# Altium PCB CFD_Chip_Test.PcbDoc (part 1 of 2)
Units mil, origin at the board's own origin, x right, y up, seen from the top; angles counter-clockwise.
Board outline 3185 x 3310 mil, 2 copper layers (Top Layer, Bottom Layer); 115 components, 90 nets, 432 pads, 99 vias.
Unrouted connection lines stored in the file: 1.
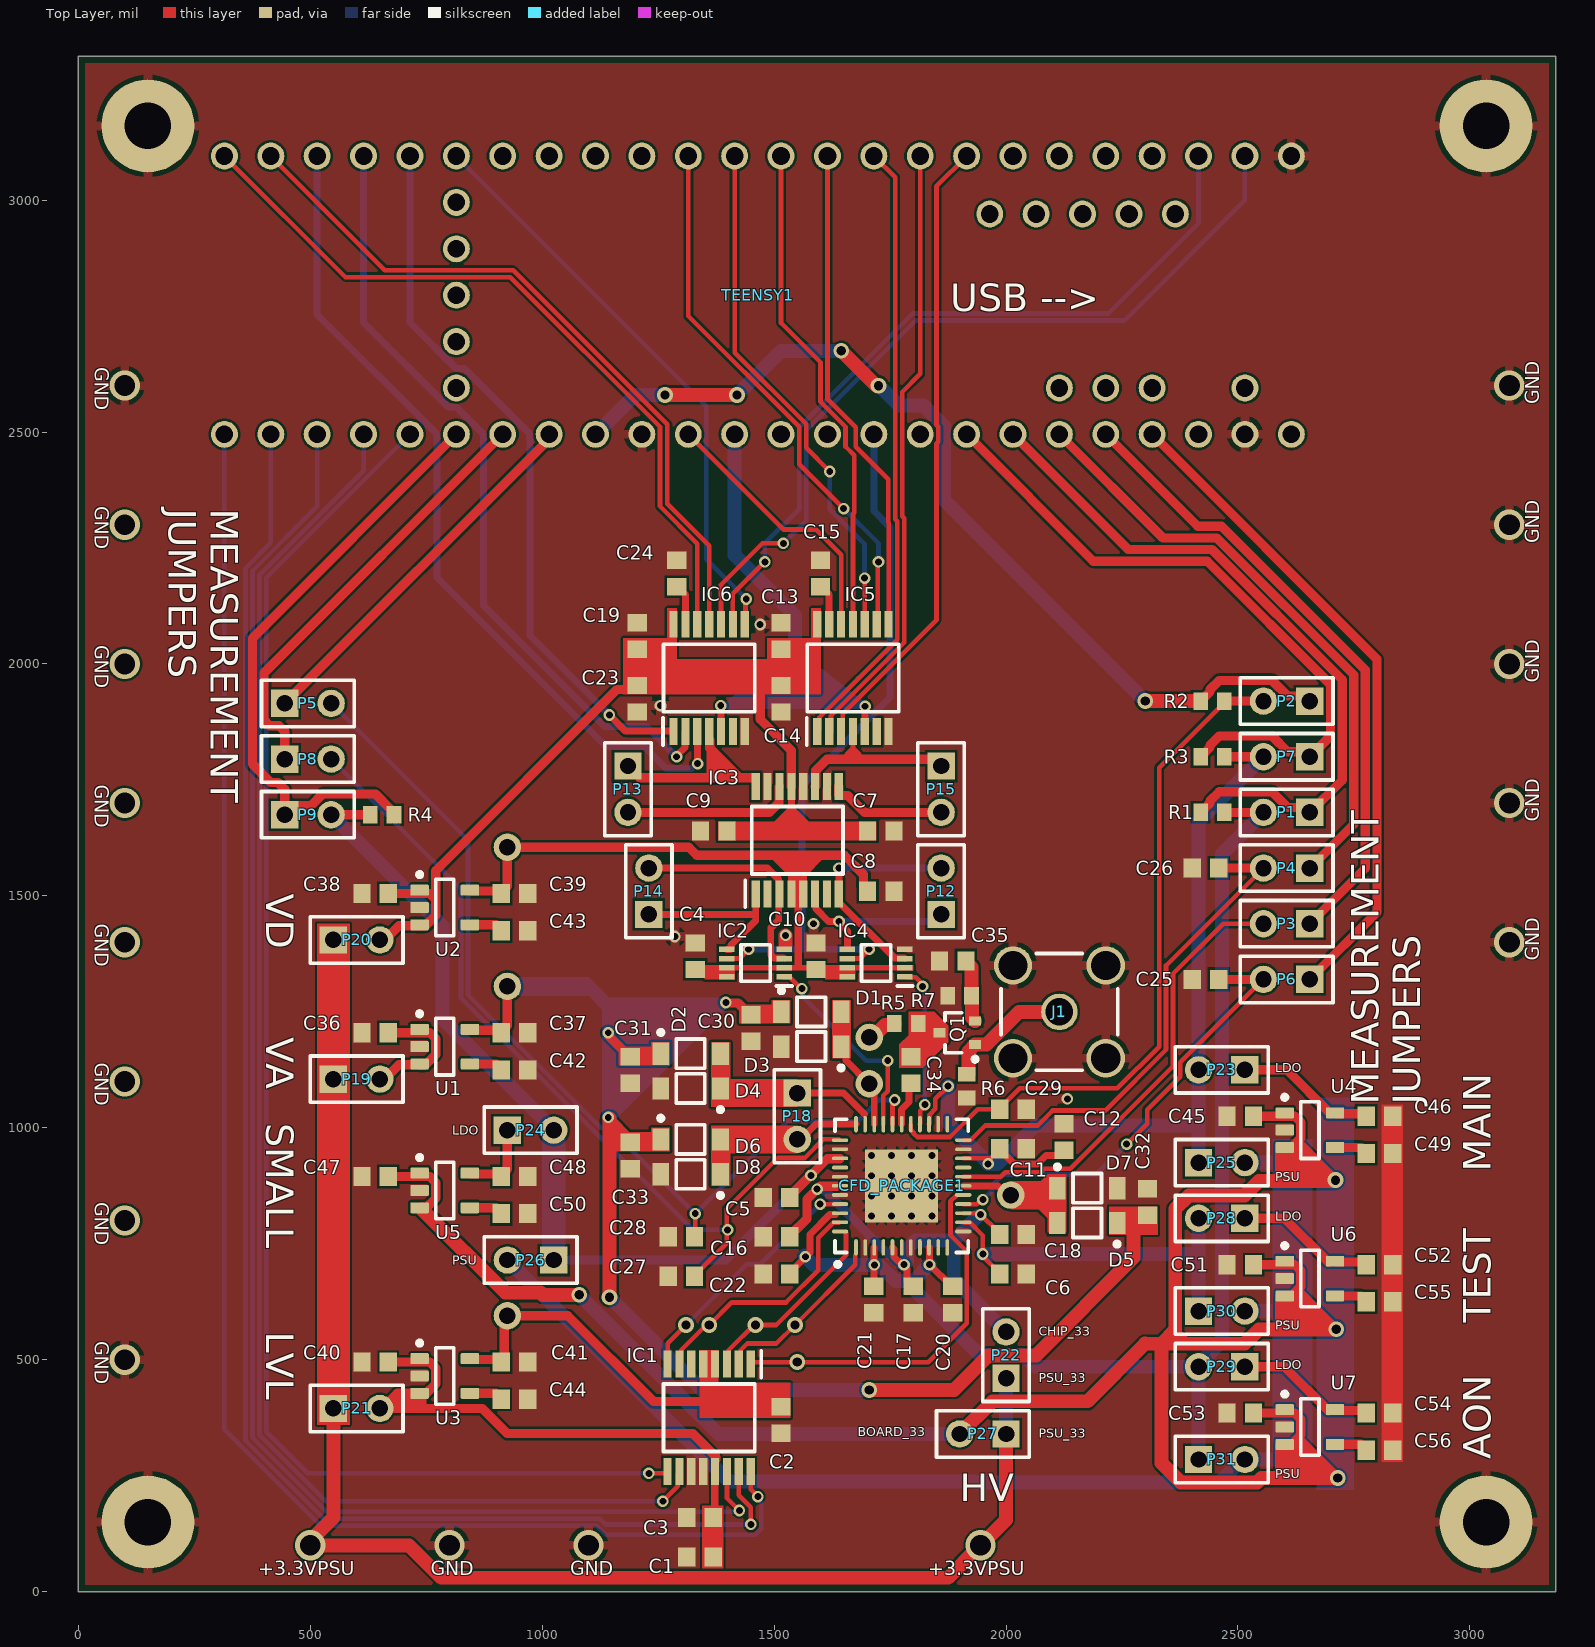
[diagram p0: Top Layer view]
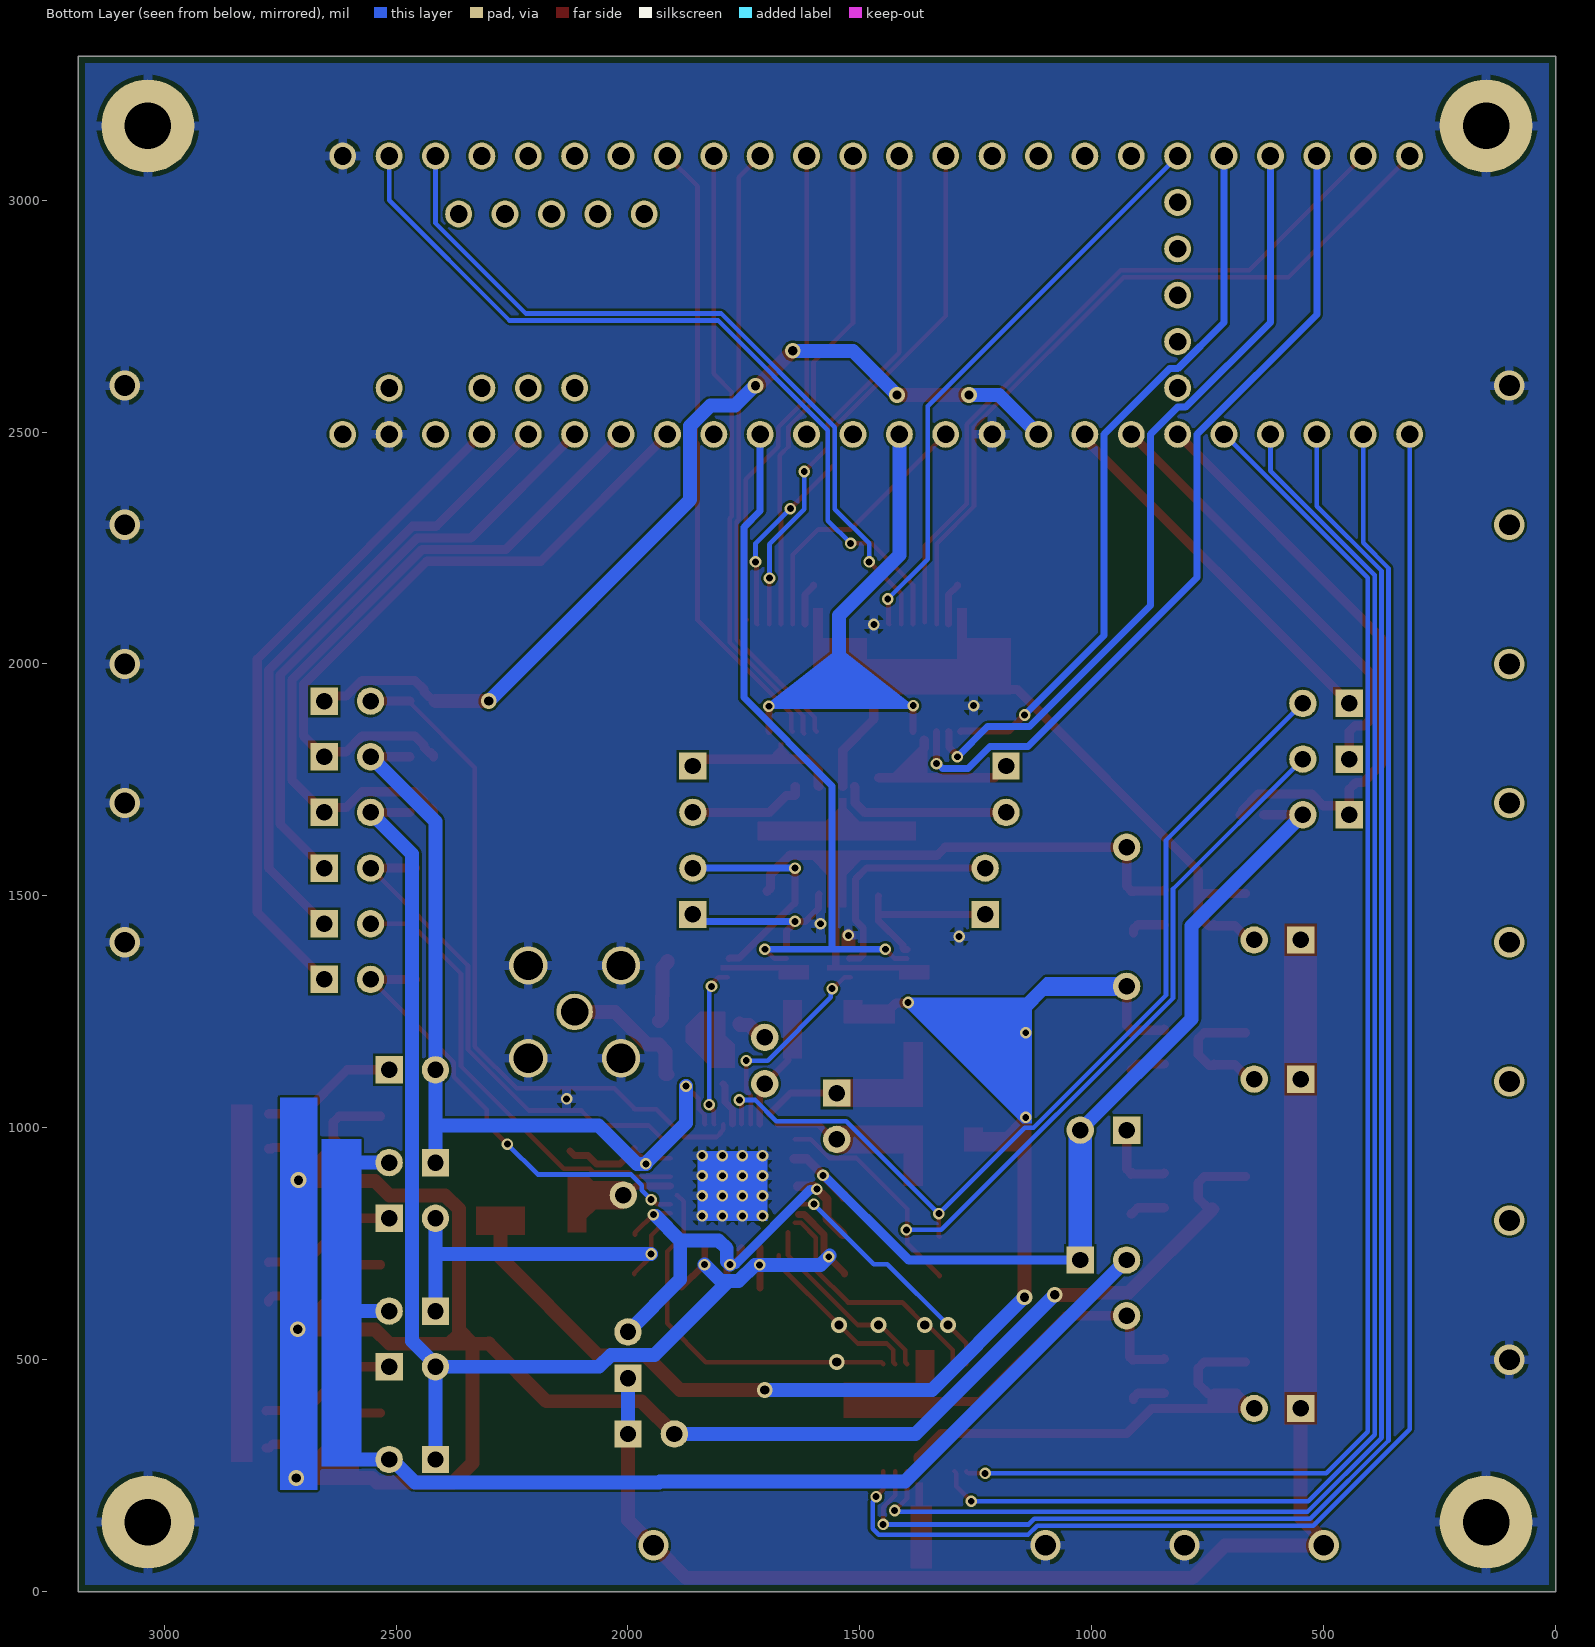
[diagram p1: Bottom Layer view, seen from below]
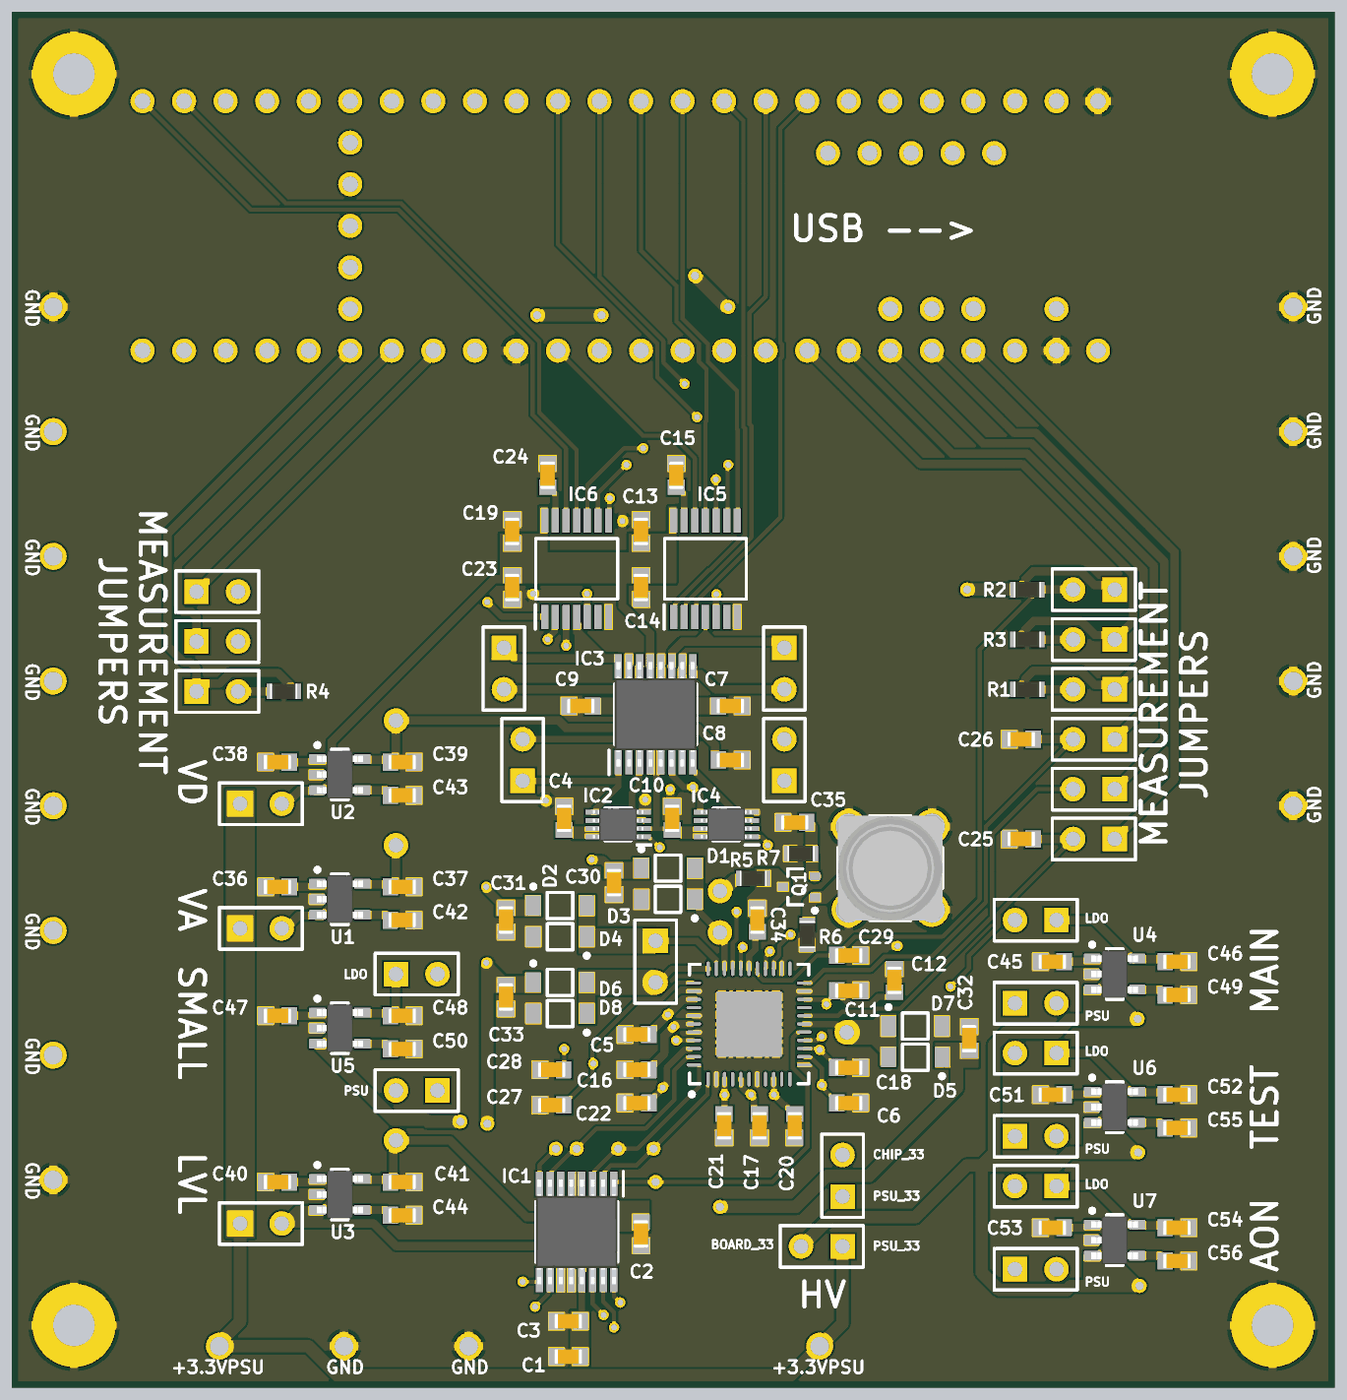
[diagram p2: 3D render of the assembled board from above, using the file's embedded part models]

## Layer stack, top to bottom
Top Solder: solder mask 0.4, Solder Resist, Dk 3.5
Top Layer: signal copper 1.4
Dielectric 1: dielectric 12.6, FR-4, Dk 4.8
Bottom Layer: signal copper 1.4
Bottom Solder: solder mask 0.4, Solder Resist, Dk 3.5

## Board outline
0,0 3185,0 3185,3310 0,3310

## Design rules (kind name [scope] priority, off if disabled: settings)
AcuteAngle [All] p1: minimum=6.00000000000000E+0001 checktracksonly=FALSE
BoardOutlineClearance [All] p1: gap=15 ignorepadtopadclearanceinfootprint=FALSE
Clearance Clearance_outa_inner2 [InNamedPolygon('outa_inner2')] p1: gap=40 ignorepadtopadclearanceinfootprint=FALSE except(0: Arc-Hole Track-Hole SMDPad-Hole THPad-Hole Via-Hole Fill-Hole Poly-Hole Region-Hole Text-Hole)
Clearance Clearance_gnd_adc_vbus [InNamedPolygon('gnd_adc') vs InNet('VBUS')] p2: gap=60 ignorepadtopadclearanceinfootprint=FALSE except(0: Arc-Hole Track-Hole SMDPad-Hole THPad-Hole Via-Hole Fill-Hole Poly-Hole Region-Hole Text-Hole)
Clearance Clearance_gnd_adc [InNamedPolygon('gnd_adc')] p3: gap=20 ignorepadtopadclearanceinfootprint=FALSE except(0: Arc-Hole Track-Hole SMDPad-Hole THPad-Hole Via-Hole Fill-Hole Poly-Hole Region-Hole Text-Hole)
Clearance Clearance_dgnd [InNamedPolygon('dgnd')] p4: gap=15 ignorepadtopadclearanceinfootprint=FALSE except(0: Arc-Hole Track-Hole SMDPad-Hole THPad-Hole Via-Hole Fill-Hole Poly-Hole Region-Hole Text-Hole)
Clearance Clearance_vbus_keepout [InPolygon vs OnLayer('Keep-Out Layer')] p5: gap=20 ignorepadtopadclearanceinfootprint=FALSE except(0: Arc-Hole Track-Hole SMDPad-Hole THPad-Hole Via-Hole Fill-Hole Poly-Hole Region-Hole Text-Hole)
Clearance Clearance_vbus [InNamedPolygon('vbus')] p6: gap=60 ignorepadtopadclearanceinfootprint=FALSE except(0: Arc-Hole Track-Hole SMDPad-Hole THPad-Hole Via-Hole Fill-Hole Poly-Hole Region-Hole Text-Hole)
Clearance Clearance_gnd [InNamedPolygon('gnd')] p7: gap=10 ignorepadtopadclearanceinfootprint=FALSE except(0: Arc-Hole Track-Hole SMDPad-Hole THPad-Hole Via-Hole Fill-Hole Poly-Hole Region-Hole Text-Hole)
Clearance [All] p8: gap=5 ignorepadtopadclearanceinfootprint=FALSE except(0: Arc-Hole Track-Hole SMDPad-Hole THPad-Hole Via-Hole Fill-Hole Poly-Hole Region-Hole Text-Hole)
DiffPairsRouting [All] p1: maxlimit=25 minlimit=5 mostfreqgap=6 toplayer_minwidth=10 toplayer_maxwidth=15 toplayer_prefwidth=15 bottomlayer_minwidth=10 bottomlayer_maxwidth=15 bottomlayer_prefwidth=15 maxuncoupledlength=500
HoleSize [All] p1: absolutevalues=TRUE maxlimit=300 minlimit=10 maxpercent=80.000 minpercent=20.000
MinimumAnnularRing [All] p1: minimumring=5
MinimumSolderMaskSliver [All] p1: minsoldermaskwidth=2
PlaneConnect [All] p1: planeconnectstyle=Relief reliefexpansion=5 reliefentries=4 reliefconductorwidth=10 reliefairgap=10
PolygonConnect PolygonConnect_4 [All vs IsNamedPolygon('NONET_L-01_P-001')] p1: thpad.connectstyle=Relief thpad.reliefconductorwidth=20 thpad.reliefentries=4 thpad.polygonreliefangle="90 Angle" thpad.airgapwidth=10 smdpad.connectstyle=Direct smdpad.reliefconductorwidth=10 smdpad.reliefentries=4 smdpad.polygonreliefangle="90 Angle" smdpad.airgapwidth=10 via.connectstyle=Relief via.reliefconductorwidth=20 via.reliefentries=4 via.polygonreliefangle="90 Angle" via.airgapwidth=10
PolygonConnect PolygonConnect_3 [All] p2: thpad.connectstyle=Relief thpad.reliefconductorwidth=20 thpad.reliefentries=4 thpad.polygonreliefangle="90 Angle" thpad.airgapwidth=10 smdpad.connectstyle=Direct smdpad.reliefconductorwidth=10 smdpad.reliefentries=4 smdpad.polygonreliefangle="90 Angle" smdpad.airgapwidth=10 via.connectstyle=Relief via.reliefconductorwidth=20 via.reliefentries=4 via.polygonreliefangle="90 Angle" via.airgapwidth=10
PolygonConnect PolygonConnect_2 [All vs IsNamedPolygon('NONET_L-01_P-001')] p3: thpad.connectstyle=Relief thpad.reliefconductorwidth=10 thpad.reliefentries=4 thpad.polygonreliefangle="90 Angle" thpad.airgapwidth=10 smdpad.connectstyle=Direct smdpad.reliefconductorwidth=10 smdpad.reliefentries=4 smdpad.polygonreliefangle="90 Angle" smdpad.airgapwidth=10 via.connectstyle=Relief via.reliefconductorwidth=20 via.reliefentries=4 via.polygonreliefangle="90 Angle" via.airgapwidth=10
PolygonConnect PolygonConnect_1 [All vs IsNamedPolygon('NONET_L-01_P-001')] p4: thpad.connectstyle=Relief thpad.reliefconductorwidth=10 thpad.reliefentries=4 thpad.polygonreliefangle="90 Angle" thpad.airgapwidth=10 smdpad.connectstyle=Direct smdpad.reliefconductorwidth=10 smdpad.reliefentries=4 smdpad.polygonreliefangle="90 Angle" smdpad.airgapwidth=10 via.connectstyle=Relief via.reliefconductorwidth=20 via.reliefentries=4 via.polygonreliefangle="90 Angle" via.airgapwidth=10
PolygonConnect [All] p5: connectstyle=Relief reliefconductorwidth=6 reliefentries=4 polygonreliefangle="90 Angle" airgapwidth=6
RoutingVias [All] p1: holewidth=12 width=24 viastyle="Through Hole" minholewidth=10 minwidth=22 maxholewidth=200 maxwidth=200
SilkToSilkClearance [All] p1: silktosilkclearance=5
SilkToSolderMaskClearance [IsPad] p1: minsilkscreentomaskgap=3 clearancetoexposedcopper=FALSE
SolderMaskExpansion [All] p1: expansion=2.2 istentingtop=FALSE
Width [All] p1: maxlimit=1000 minlimit=5 preferedwidth=10 minimp=50.000000 maximp=50.000000 favimp=50.000000
24 further rules are at their usual default settings.

## Classes and differential pairs
component class Teensy_Interface: C1 C2 C3 IC1 P1 P2 P3 P4 P5 P6 P7 P8 P9 R1 R2 R3 R4 TEENSY1
component class Power: C36 C37 C38 C39 C40 C41 C42 C43 C44 C45 C46 C47 C48 C49 C50 C51 C52 C53 C54 C55 C56 P19 P20 P21 P22 P23 P24 P25 P26 P27 P28 P29 P30 P31 U1 U2 U3 U4 U5 U6 U7
component class Chip_Inputs: C30 C31 C32 C33 C34 C35 D1 D2 D3 D4 D5 D6 D7 D8 J1 P18 Q1 R5 R6 R7
component class Chip: C4 C5 C6 C7 C8 C9 C10 C11 C12 C13 C14 C15 C16 C17 C18 C19 C20 C21 C22 C23 C24 C25 C26 C27 C28 C29 CFD_PACKAGE1 IC2 IC3 IC4 IC5 IC6 P12 P13 P14 P15

## Components (designator, comment, footprint, x,y, rotation, side; value= is the part's Value field where it differs from the comment)
C1 "1uF" CAPC1608X90X35ML10T15 1340,75 r0 top
C2 "100nF" CAPC1608X90X35ML10T15 1515,370 r270 top
C3 "100nF" CAPC1608X90X35ML10T15 1340,160 r0 top
C4 "10nF" CAPC1608X90X35ML10T15 1330,1370 r270 top
C5 "10nF" CAPC1608X90X35ML10T15 1505,850 r0 top
C6 "10nF" CAPC1608X90X35ML10T15 2015,685 r0 top
C7 "10nF" CAPC1608X90X35ML10T15 1730,1640 r180 top
C8 "100nF" CAPC1608X90X35ML10T15 1730,1510 r180 top
C9 "100nF" CAPC1608X90X35ML10T15 1370,1640 r0 top
C10 "10nF" CAPC1608X90X35ML10T15 1590,1370 r270 top
C11 "10nF" CAPC1608X90X35ML10T15 2015,955 r180 top
C12 "10nF" CAPC1608X90X35ML10T15 2125,980 r270 top
C13 "1uF" CAPC1608X90X35ML10T15 1515,2060 r90 top
C14 "100nF" CAPC1608X90X35ML10T15 1515,1925 r270 top
C15 "1uF" CAPC1608X90X35ML10T15 1600,2195 r90 top
C16 "10nF" CAPC1608X90X35ML10T15 1505,765 r0 top
C17 "10nF" CAPC1608X90X35ML10T15 1800,630 r90 top
C18 "10nF" CAPC1608X90X35ML10T15 2015,770 r180 top
C19 "1uF" CAPC1608X90X35ML10T15 1205,2060 r90 top
C20 "10nF" CAPC1608X90X35ML10T15 1885,630 r90 top
C21 "10nF" CAPC1608X90X35ML10T15 1715,630 r90 top
C22 "10nF" CAPC1608X90X35ML10T15 1505,685 r0 top
C23 "100nF" CAPC1608X90X35ML10T15 1205,1925 r270 top
C24 "1uF" CAPC1608X90X35ML10T15 1290,2195 r90 top
C25 "(10nF)" CAPC1608X90X35ML10T15 2430,1320 r0 top
C26 "(10nF)" CAPC1608X90X35ML10T15 2430,1560 r0 top
C27 "(10nF)" CAPC1608X90X35ML10T15 1300,680 r0 top
C28 "(10nF)" CAPC1608X90X35ML10T15 1300,765 r0 top
C29 "(10nF)" CAPC1608X90X35ML10T15 2015,1040 r180 top
C30 "10nF" CAPC1608X90X35ML10T15 1450,1215 r90 top
C31 "10nF" CAPC1608X90X35ML10T15 1190,1125 r90 top
C32 "10nF" CAPC1608X90X35ML10T15 2305,840 r270 top
C33 "10nF" CAPC1608X90X35ML10T15 1190,940 r90 top
C34 "Value?" CAPC1608X90X35ML10T15 1795,1125 r90 top
C35 "(Value?)" CAPC1608X90X35ML10T15 1885,1360 r0 top
C36 "(Value)" CAPC1608X90X35ML10T15 640,1205 r180 top
C37 "(Value)" CAPC1608X90X35ML10T15 940,1205 r0 top
C38 "(Value)" CAPC1608X90X35ML10T15 640,1505 r180 top
C39 "(Value)" CAPC1608X90X35ML10T15 940,1505 r0 top
C40 "(Value)" CAPC1608X90X35ML10T15 640,495 r180 top
C41 "(Value)" CAPC1608X90X35ML10T15 940,495 r0 top
C42 "(Value)" CAPC1608X90X35ML10T15 940,1125 r0 top
C43 "(Value)" CAPC1608X90X35ML10T15 940,1425 r0 top
C44 "(Value)" CAPC1608X90X35ML10T15 940,415 r0 top
C45 "(Value)" CAPC1608X90X35ML10T15 2505,1025 r180 top
C46 "(Value)" CAPC1608X90X35ML10T15 2805,1025 r0 top
C47 "(Value)" CAPC1608X90X35ML10T15 640,895 r180 top
C48 "(Value)" CAPC1608X90X35ML10T15 940,895 r0 top
C49 "(Value)" CAPC1608X90X35ML10T15 2805,945 r0 top
C50 "(Value)" CAPC1608X90X35ML10T15 940,815 r0 top
C51 "(Value)" CAPC1608X90X35ML10T15 2505,705 r180 top
C52 "(Value)" CAPC1608X90X35ML10T15 2805,705 r0 top
C53 "(Value)" CAPC1608X90X35ML10T15 2505,385 r180 top
C54 "(Value)" CAPC1608X90X35ML10T15 2805,385 r0 top
C55 "(Value)" CAPC1608X90X35ML10T15 2805,625 r0 top
C56 "(Value)" CAPC1608X90X35ML10T15 2805,305 r0 top
CFD_PACKAGE1 "CFD_package" QFN50P700X700X80_HS-45N_WIDEVIAS 1775,875 r90 top
D1 "" ONSC-SOD-123-2-425-04_V 1580,1250 r0 top
D2 "" ONSC-SOD-123-2-425-04_V 1320,1160 r0 top
D3 "" ONSC-SOD-123-2-425-04_V 1580,1175 r180 top
D4 "" ONSC-SOD-123-2-425-04_V 1320,1085 r180 top
D5 "" ONSC-SOD-123-2-425-04_V 2175,795 r180 top
D6 "" ONSC-SOD-123-2-425-04_V 1320,975 r0 top
D7 "" ONSC-SOD-123-2-425-04_V 2175,870 r0 top
D8 "" ONSC-SOD-123-2-425-04_V 1320,900 r180 top
IC1 "MAX13003EEUE+" SOP65P640X110-16N 1360,375 r270 top
IC2 "NL17SZ74USG" SOP50P310X90-8N 1460,1355 r180 top
IC3 "MAX13003EEUE+" SOP65P640X110-16N 1550,1620 r90 top
IC4 "NL17SZ74USG" SOP50P310X90-8N 1720,1355 r180 top
IC5 "TDC7200PWR" SOP65P640X120-14N 1670,1970 r90 top
IC6 "TDC7200PWR" SOP65P640X120-14N 1360,1970 r90 top
J1 "5-1814832-1" TECO-5-1814832-1_V 2115,1250 r0 top
P1 "Header 2" HDR1X2 2655,1680 r180 top
P2 "Header 2" HDR1X2 2655,1920 r180 top
P3 "Header 2" HDR1X2 2655,1440 r180 top
P4 "Header 2" HDR1X2 2655,1560 r180 top
P5 "Header 2" HDR1X2 445,1915 r0 top
P6 "Header 2" HDR1X2 2655,1320 r180 top
P7 "Header 2" HDR1X2 2655,1800 r180 top
P8 "Header 2" HDR1X2 445,1795 r0 top
P9 "Header 2" HDR1X2 445,1675 r0 top
P12 "Header 2" HDR1X2 1860,1460 r90 top
P13 "Header 2" HDR1X2 1185,1780 r270 top
P14 "Header 2" HDR1X2 1230,1460 r90 top
P15 "Header 2" HDR1X2 1860,1780 r270 top
P18 "Header 2" HDR1X2 1550,1075 r270 top
P19 "Header 2" HDR1X2 550,1105 r0 top
P20 "Header 2" HDR1X2 550,1405 r0 top
P21 "Header 2" HDR1X2 550,395 r0 top
P22 "Header 2" HDR1X2 2000,460 r90 top
P23 "Header 2" HDR1X2 2515,1125 r180 top
P24 "Header 2" HDR1X2 925,995 r0 top
P25 "Header 2" HDR1X2 2415,925 r0 top
P26 "Header 2" HDR1X2 1025,715 r180 top
P27 "Header 2" HDR1X2 2000,340 r180 top
P28 "Header 2" HDR1X2 2515,805 r180 top
P29 "Header 2" HDR1X2 2515,485 r180 top
P30 "Header 2" HDR1X2 2415,605 r0 top
P31 "Header 2" HDR1X2 2415,285 r0 top
Q1 "BFR182W" INF-SOT323_L 1895,1205 r180 top
R1 "0Ohm" RESC1609X50X30NL8T20 2445,1680 r0 top
R2 "0Ohm" RESC1609X50X30NL8T20 2445,1920 r0 top
R3 "0Ohm" RESC1609X50X30NL8T20 2445,1800 r0 top
R4 "0Ohm" RESC1609X50X30NL8T20 655,1675 r180 top
R5 "(Value?)" RESC1609X50X30NL8T20 1785,1225 r180 top
R6 "(50Ohm)" RESC1609X50X30NL8T20 1915,1090 r90 top
R7 "0Ohm (Value?)" RESC1609X50X30NL8T20 1900,1285 r0 top
TEENSY1 "TEENSY_3.5/3.6" TEENSY_3.5/3.6 1515,2795 r180 top locked
U1 "TPS73218DBVT" DBV0005A_N 790,1175 r0 top
U2 "TPS73218DBVT" DBV0005A_N 790,1475 r0 top
U3 "TPS73218DBVT" DBV0005A_N 790,465 r0 top
U4 "TPS73218DBVT" DBV0005A_N 2655,995 r0 top
U5 "TPS73218DBVT" DBV0005A_N 790,865 r0 top
U6 "TPS73218DBVT" DBV0005A_N 2655,675 r0 top
U7 "TPS73218DBVT" DBV0005A_N 2655,355 r0 top

## Footprints (in the part's own frame and the unit in brackets; to place one, negate y for a bottom-side part, rotate by r counter-clockwise, add the part's x,y. Pads: shape width x height; smd on the part's side, far side on the other; paste and mask are expansions set on the pad)
CAPC1608X90X35ML10T15 [mm] "Chip Capacitor, 2-Leads, Body 1.7x0.9mm, IPC Low Density"
  rect 0.95x1.05 smd: 1(-0.725,0) 2(0.725,0)
  body extent -0.85,-0.45 0.85,0.45, height 0.9
DBV0005A_N [mm] "SOT23, 5-Leads, Body 3.05x1.75mm, Pitch 0.95mm, IPC Medium Density"
  rrect17% 1x0.6 smd: 1(-1.375,0.95) 2(-1.375,0) 3(-1.375,-0.95) 4(1.375,-0.95) 5(1.375,0.95)
  silkscreen extent -1.5,-1.55 0.5,1.92, body extent -1.42,-1.46 1.42,1.46, height 1.08
HDR1X2 [mm] "Connector; Header; 2 Position"
  rect 1.5x1.5 hole 0.9: 1(0,0)
  round 1.5 hole 0.9: 2(2.54,0)
  silkscreen extent -1.27,-1.27 3.81,1.27
INF-SOT323_L [mm] "SOT23, 3-Leads, Body 2x1.25 mm, Pitch 0.65 mm, IPC High Density"
  rect 0.65x0.5 smd: 1(-0.975,0.65) 2(-0.975,-0.65) 3(0.975,0)
  silkscreen extent -1.1,-1.1 0.67,1.57, body extent -0.67,-1.1 0.67,1.1, height 1
ONSC-SOD-123-2-425-04_V [mm] "SOD, 2-Leads, Body 2.69x1.6mm"
  rect 0.91x1.22 smd: 1(-1.635,0) 2(1.635,0)
  silkscreen extent -1.76,-0.8 0.78,1.28, body extent -1.35,-0.8 1.35,0.8, height 1.35
QFN50P700X700X80_HS-45N_WIDEVIAS [mm] "QFN, 44-Leads, Body 7.00x7.00mm, Pitch 0.50mm, Thermal Pad 4.00x4.00mm, IPC Medium Density"
  oval 0.9x0.2 smd: 1(-3.375,2.5) 2(-3.375,2) 3(-3.375,1.5) 4(-3.375,1) 5(-3.375,0.5) 6(-3.375,0) 7(-3.375,-0.5) 8(-3.375,-1) 9(-3.375,-1.5) 10(-3.375,-2) 11(-3.375,-2.5) 23(3.375,-2.5) 24(3.375,-2) 25(3.375,-1.5) 26(3.375,-1) 27(3.375,-0.5) 28(3.375,0) 29(3.375,0.5) 30(3.375,1) 31(3.375,1.5) 32(3.375,2) 33(3.375,2.5)
  oval 0.2x0.9 smd: 12(-2.5,-3.375) 13(-2,-3.375) 14(-1.5,-3.375) 15(-1,-3.375) 16(-0.5,-3.375) 17(0,-3.375) 18(0.5,-3.375) 19(1,-3.375) 20(1.5,-3.375) 21(2,-3.375) 22(2.5,-3.375) 34(2.5,3.375) 35(2,3.375) 36(1.5,3.375) 37(1,3.375) 38(0.5,3.375) 39(0,3.375) 40(-0.5,3.375) 41(-1,3.375) 42(-1.5,3.375) 43(-2,3.375) 44(-2.5,3.375)
  rect 4x4 smd: 35(0,0)
  silkscreen extent -4.42,-3.65 3.65,3.65, body extent -3.5,-3.5 3.5,3.5, height 0.8
RESC1609X50X30NL8T20 [mm] "Chip Resistor, 2-Leads, Body 1.65x0.95mm, IPC Medium Density"
  rect 0.8x0.95 smd: 1(-0.65,0) 2(0.65,0)
  body extent -0.82,-0.48 0.82,0.48, height 0.5
SOP50P310X90-8N [mm]
  rect 0.85x0.3 smd: 1(-1.575,0.75) 2(-1.575,0.25) 3(-1.575,-0.25) 4(-1.575,-0.75) 5(1.575,-0.75) 6(1.575,-0.25) 7(1.575,0.25) 8(1.575,0.75)
  silkscreen extent -2,-1 0.8,1.25, body extent -1.55,-1 1.55,1, height 0.9
SOP65P640X110-16N [mm]
  rect 1.475x0.45 smd: 1(-2.938,2.275) 2(-2.938,1.625) 3(-2.938,0.975) 4(-2.938,0.325) 5(-2.938,-0.325) 6(-2.938,-0.975) 7(-2.938,-1.625) 8(-2.938,-2.275) 9(2.938,-2.275) 10(2.938,-1.625) 11(2.938,-0.975) 12(2.938,-0.325) 13(2.938,0.325) 14(2.938,0.975) 15(2.938,1.625) 16(2.938,2.275)
  silkscreen extent -3.67,-2.5 1.85,2.85, body extent -3.2,-2.5 3.2,2.5, height 1.1
SOP65P640X120-14N [mm]
  rect 1.475x0.45 smd: 1(-2.938,1.95) 2(-2.938,1.3) 3(-2.938,0.65) 4(-2.938,0) 5(-2.938,-0.65) 6(-2.938,-1.3) 7(-2.938,-1.95) 8(2.938,-1.95) 9(2.938,-1.3) 10(2.938,-0.65) 11(2.938,0) 12(2.938,0.65) 13(2.938,1.3) 14(2.938,1.95)
  silkscreen extent -3.67,-2.5 1.85,2.52, body extent -3.2,-2.5 3.2,2.5, height 1.13
TECO-5-1814832-1_V [mm] "THD, 5-Leads, Body 6.4x6.4mm, Pitch 5.08mm"
  round 2 hole 1.5: 1(0,0)
  round 2.1 hole 1.6: 2(-2.54,2.54) 3(-2.54,-2.54) 4(2.54,-2.54) 5(2.54,2.54)
  silkscreen extent -3.2,-3.2 3.2,3.2, body extent -3.21,-3.21 3.19,3.19, height 9.5
TEENSY_3.5/3.6 [mil]
  round 58 / inner round 60 / far side round 58 hole 38: 0/RX(-1000,-300) 1/TX(-900,-300) 2(-800,-300) 3/CANTX(-700,-300) 3V3(300,-300) 3V3_2(700,-100) 3V3_LO(-900,300) 4/CANRX(-600,-300) 5(-500,-300) 6(-400,-300) 7(-300,-300) 8(-200,-300) 9/CS(-100,-300) 10/CS(0,-300) 11/MOSI(100,-300) 12/MISO(200,-300) 13/SCK(200,300) 14/A0(100,300) 15/A1(0,300) 16/A2(-100,300) 17/A3(-200,300) 18/A4/SDA(-300,300) 19/A5/SCL(-400,300) 20/A6(-500,300) 21/A7(-600,300) 21/DAC0(500,300) 22/A8(-700,300) 23/A9(-800,300) 24(400,-300) 25(500,-300) 26(600,-300) 27(700,-300) 28(800,-300) 29(900,-300) 30(1000,-300) 31/A12(1100,-300) 32/A13(1200,-300) 33/A14(1200,300) 34/A15(1100,300) 35/A16(1000,300) 36/A17(900,300) 37/A18(800,300) 38/A19(700,300) 39/A20(600,300) A10(-700,200) A11(-600,200) A22/DAC1(400,300) AGND(-1000,300) AREF(-800,200) GND(-1100,-300) GND2(300,300) GND3(700,0) PROG(700,100) RESET(700,200) U5V(-850,-175) UD+(-650,-175) UD-(-750,-175) UGND1(-550,-175) UGND2(-450,-175) VBAT(700,-200) VIN(-1100,300) VUSB(-1000,200)

## Part data
C1 C2 C3 C4 C5 C6 C7 C8 C9 C10 C11 C12 C13 C14 C15 C16 C17 C18 C19 C20 C21 C22 C23 C24 C25 C26 C27 C28 C29 C30 C31 C32 C33 C34 C35 C36 C37 C38 C39 C40 C41 C42 C43 C44 C45 C46 C47 C48 C49 C50 C51 C52 C53 C54 C55 C56: library part CMP-2000-04945-1, "0603", Capacitance=22pF, Dielectric=C0G, Manufacturer=Murata, Package Description="2-Pin Surface Mount Device, Body 1.6 x 0.8 mm", Package Reference=603, Rated Voltage=50V, Tolerance (%)=±5%, Case Size/Dimension=0603, Datasheet URL=https://datasheet.ciiva.com/11786/0900766b807a1cab-11786398.pdf, Datasheet Version=Jul-06, Manufacturer URL=http://www.murata.com/
D1 D2 D3 D4 D5 D6 D7 D8: library part CMP-1060-00509-1, "Zener Voltage Regulator, 2-Pin SOD-123, Pb-Free, Tape and Reel", Manufacturer="On Semiconductor", PartNumber=MMSZ4679T1G, ComponentLink1Description="Manufacturer URL", ComponentLink1URL=http://www.onsemi.com/, ComponentLink2Description=Datasheet, ComponentLink2URL=http://www.onsemi.com/pub_link/Collateral/MMSZ4678T1-D.PDF, ComponentLink3Description="Package Specification", ComponentLink3URL=http://www.onsemi.com/pub_link/Collateral/425-04.PDF, DatasheetVersion="Rev. 9", Mounting Technology="Surface Mount", P Max (W)=0.5, PackageDescription="2-Pin SOD, Body 1.6 x 2.69 mm", PackageReference=SOD-123-2-425-04, PackageVersion="Rev. G, 10/2009", Packing="Tape and Reel", RoHS=Pb-Free, VZ Typ (V)=2
IC1 IC3: "Integrated Circuit", Manufacturer_Name="Maxim Integrated", Datasheet Link=https://pdfserv.maximintegrated.com/en/ds/MAX13000E-MAX13005E.pdf, Height=1.1mm, Manufacturer_Part_Number=MAX13003EEUE+
IC2 IC4: "Flip Flops 1.65-5.5V CMOS Single D-Type", Manufacturer_Name="ON Semiconductor", Datasheet Link=http://www.onsemi.com/pub/Collateral/NL17SZ74-D.PDF, Height=0.9mm, Manufacturer_Part_Number=NL17SZ74USG
IC5 IC6: "Integrated Circuit", Manufacturer_Name="Texas Instruments", Datasheet Link=http://www.ti.com/lit/gpn/tdc7200, Height=1.2mm, Manufacturer_Part_Number=TDC7200PWR
J1: library part CMP-2000-05415-1, "SMA Connector, Pitch 5.08 mm, 1 Position, Height 9.5 mm, Tail Length 4 mm, -65 to 165 degC, RoHS, Bulk", Frequency Max=3GHz, Manufacturer="TE Connectivity", Package Description="SMA Connector, Pitch 5.08 mm, 1 Position, Height 9.5 mm, Tail Length 4 mm", Coaxial Cable Types=-, Coaxial Termination=Solder, Connector Body Style=StraightJack, Connector Mounting=PCBMount, Connector Type=SMACoaxial, Contact Material=BerylliumCopper, Contact Plating=GoldPlatedContacts, Datasheet URL=http://www.onlinecomponents.com/productFiles/mf-AMP/eng_cd_1814832_a.pdf, Datasheet Version="Rev. B1, 03/2011", Impedance=50ohm, Manufacturer URL=http://www.te.com/, Package Reference=5-1814832-1, Product Range=ZDCSeries, SVHC=NoSVHC(15-Jun-2015)
P1 P2 P3 P4 P5 P6 P7 P8 P9 P12 P13 P14 P15 P18 P19 P20 P21 P22 P23 P24 P25 P26 P27 P28 P29 P30 P31: "Header, 2-Pin", LatestRevisionDate=17-Jul-2002, LatestRevisionNote="Re-released for DXP Platform.", Publisher="Altium Limited"
Q1: library part CMP-1191-00013-1, "NPN Silicon RF Transistor, 12 V VCEO, 35 mA IC, 19 dB Gmax, SOT323, Green", Manufacturer=Infineon, ComponentLink1Description="Manufacturer URL", ComponentLink1URL=http://www.infineon.com/, ComponentLink2Description=Datasheet, ComponentLink2URL=http://www.infineon.com/dgdl/bfr182w.pdf?folderId=db3a30431400ef68011425b1354605c1&fileId=db3a30431400ef680114269d1e43064c&location=en.Products.RF.RF_Transistors_.Low_Noise_Si_Transistors_up_to_2_5_GHz.DATASHEET.bfr182w.pdf, ComponentLink3Description="Package Specification", ComponentLink3URL=http://www.infineon.com/dgdl/SOT323-Package_Overview.pdf?folderId=db3a30431936bc4b0119533e1dcb3c92&fileId=db3a30431936bc4b011953495f283cb1, DatasheetVersion=Apr-2010, Gmax (typ)="19 dB", Green=yes, Group="For low frequencies e.g. VHF/UHF", Halogen-free=yes, IC (max)="35 mA", Mounting Technology="Surface Mount", NFmin (typ)="0.9 dB", PackageDescription="3-Pin Small Outline Transistor Package, 1.25 x 2 mm Body, 0.65 mm Pitch", PackageReference=SOT323, PartNumber=BFR182W, Ptot (max)=250mW, VCEO (max)="12 V"
R1 R2 R3 R4 R5 R6 R7: library part CMP-2000-03816-5, "Chip Resistor, 0 Ohm, Jumper, 100 mW, -55 to 155 degC, 0603 (1608 Metric), RoHS, Tape and Reel", Manufacturer="Vishay Semiconductor", Max Operating Temperature="155 degC", Min Operating Temperature="-55 degC", Package Quantity=5000, Voltage Rating="75 V", ComponentLink1Description="Manufacturer URL", ComponentLink1URL=http://www.vishay.com/, ComponentLink2Description=Datasheet, ComponentLink2URL=http://www.vishay.com/docs/20035/dcrcwe3.pdf, DatasheetVersion=06/2012, Height="0.45 mm", Length="1.55 mm", Mount="Surface Mount", Mounting Technology="Surface Mount", PackageDescription="2-Pin Surface Mount Device, Body 1.575 x 0.85 mm", PackageReference=0603, Packaging="Tape and Reel", Pins=2, REACH SVHC=Unknown, RoHSCompliant=true
U1 U2 U3 U4 U5 U6 U7: library part CMP-0394-00378-2, "Single Output Fast Transient Response LDO, 200 mA, Fixed 1.8 V Output, 1.7 to 5.5 V Input, with Reverse Current Protection, 5-pin SOT-23 (DBV), -40 to 85 degC, Green (RoHS & no Sb/Br)", Manufacturer="Texas Instruments", Accuracy(%)=1, Code_JEDEC=MO-178, ComponentLink1Description="Manufacturer URL", ComponentLink1URL=http://www.ti.com/, ComponentLink2Description=Datasheet, ComponentLink2URL=http://www.ti.com/general/docs/lit/getliterature.tsp?genericPartNumber=TPS73218&fileType=pdf, ComponentLink3Description="Package Specification", ComponentLink3URL=http://www.ti.com/litv/pdf/mpds018i, DatasheetVersion=SBVS037O, Eco-Plan="Green (RoHS & no Sb/Br)", Fixed Output Options(V)=1.8, Iout(Max)(A)=0.25, Iq(Typ)(mA)=0.4, Mounting Technology="Surface Mount", PackageDescription="5-Pin Plastic Small Outline, Body 1.60 Ãƒâ€” 2.90 mm, Pitch 0.95 mm", PackageReference=DBV0005A, PackageVersion=4073253-4/K, PartNumber=TPS73218DBVT, SubFamily="Single Channel LDO", Vdo(Typ)(mV)=40, Vin(Max)(V)=5.5, Vin(Min)(V)=1.7, Vout Adj(Max)(V)=1.8, Vout Adj(Min)(V)=1.8
TEENSY1: DeviceSetName=TEENSY_3.5/3.6, GateName_1=G$1, LibraryName=Teensy356, Package=TEENSY_3.5/3.6, SymbolName_1=TEENSY_3.5/3.6

## Free pads (board coordinates)
  round 200 hole 100: 3(150,150) 3(150,3160) 3(3035,150) 3(3035,3160)
  round 59.06 hole 35.43: 4(925,595) 4(925,1305) 4(925,1605) 4(1705,1095) 4(1705,1195) 4(2010,855)

## Via types
v1: diameter 25, hole 15, Top Layer to Bottom Layer, 66 vias
v2: diameter 65, hole 45, Top Layer to Bottom Layer, 17 vias
v3: diameter 34, hole 20, Top Layer to Bottom Layer, 16 vias

## Nets (pads, with @x,y where several pads share a name; then routed paths per layer and width w, separated by ;. In a path a pad name is that pad's centre, name@x,y a point inside that pad or via, vN(x,y) a via of type N, cw(c..) or ccw(c..) an arc to the next point about the centre after c; other vN are vias at no path point)
+1.8VA: C30.2 C31.2 C32.2 C33.2 C37.1 D1.1 D2.1 D5.1 D6.1 pad.4@925,1305 U1.5 | length 2159.4
  Top Layer w20: U1.5 845.94,1210.59 914.41,1210.59 C37.1@915,1210 ; C37.1@915,1205 C37.1@915,1210 ; pad.4@925,1305 925,1220.51 915,1210.51 C37.1@915,1210 ; v1(1142.5,1022.5) v1@1145,1020 ; v1(1142.5,1205) 1143.46,1204.04 1143.46,1198.12 C31.2@1186.57,1155 ; v1@1149.33,1015.67 C33.2@1185,980 ; v1(1396.1,1270.17) 1397.06,1269.22 1422.36,1269.22 1445,1246.57 C30.2@1445,1245
  Top Layer w30: v3(1145,635) v1@1145,1020 ; v3(1705,435) 1887.66,435 1962.19,509.53 2064.53,509.53 2275,720 2275,805
  Bottom Layer w30: v3(1145,635) 1345,435 v3(1705,435)
+1.8VD: C4.2 C8.2 C10.2 C39.1 IC2.2 IC2.7 IC2.8 IC3.4 IC3.5 IC4.2 IC4.7 IC4.8 pad.4@925,1605 U2.5 | length 997.3
  Top Layer w20: U2.5 845.94,1510.59 909.41,1510.59 C39.1@910,1510 ; C39.1@915,1510 915,1510.51 925,1520.51 925,1605 1315.87,1605 1333.37,1587.5 1651.39,1587.5 1692.76,1546.13 1692.76,1517.24 C8.2@1700,1510
+1.8VD_SHIFT: C2.1 C41.1 IC1.4 IC1.5 pad.4@925,595 U3.5 | length 681.2
  Top Layer w20: U3.5 845.94,500.59 909.41,500.59 910,500 912.56,500 918.23,505.67 918.23,588.23 925,595 1055.28,595 1240.28,410 1360,410
+1.8VDDAON: C54.1 P29.1 U7.5 | length 291.2
  Top Layer w20: P29.1 2600,485 U7.5@2695,390 ; U7.5 2710.94,390.59 2779.41,390.59 C54.1@2780,390
+1.8VDDMAIN: C46.1 P23.1 U4.5 | length 291.2
  Top Layer w20: P23.1 2605,1125 U4.5@2700,1030 ; U4.5 2710.94,1030.59 2774.41,1030.59 C46.1@2775,1030
+1.8VDDSMALL: C48.1 P24.1 U5.5 | length 172.6
  Top Layer w20: U5.5 845.94,900.59 910.59,900.59 C48.1@915,905 ; C48.1@915,900 915,900.51 925,910.51 P24.1
+1.8VDDTEST: C52.1 P28.1 U6.5 | length 286.2
  Top Layer w20: P28.1 2600,805 U6.5@2695,710 ; U6.5 2710.94,710.59 2774.41,710.59 C52.1@2775,710
+1.8VPSU: P25.2 P26.2 P30.2 P31.2 | length 2093.3
  Bottom Layer w30: P26.2 1402.5,237.5 1930.57,237.5 1932.6,235.47 2459.13,235.47 2508.66,285 P31.2 2605,285 2610,290 ; P30.2 2605,605 2610,610 ; P25.2 2605,925
+3.3VA: C36.1 P19.2 U1.1 U1.3 | length 280.7
  Top Layer w20: P19.2@655,1105 660.57,1105 691.36,1135.79 734.06,1135.79 U1.3 ; C36.1 757.4,1205 770.55,1191.85 770.55,1158.15 747.4,1135 U1.3@735,1135
+3.3VCHIP: C45.1 C47.1 C51.1 C53.1 P27.2 U4.1 U4.3 U5.1 U5.3 U6.1 U6.3 U7.1 U7.3 | length 4622.9
  Top Layer w20: C47.1 757.4,895 770.55,881.85 770.55,848.15 747.4,825 U5.3@735,825 ; C53.1 2622.4,385 2635.55,371.85 2635.55,338.15 2623.7,326.3 2633.7,326.3 v3(2715,245) ; C51.1 2622.4,705 2635.55,691.85 2635.55,658.15 2623.7,646.3 2631.4,646.3 v3(2711.71,566) 2712.7,565 v3@2715,565 ; C45.1 2622.4,1025 2635.55,1011.85 2635.55,978.15 2623.7,966.3 2631.39,966.3 2707.69,890 v3@2710,890
  Top Layer w30: U5.3@740.55,824.41 920.43,644.53 997.41,644.53 1001.94,640 v3(1080,640) ; P27.2 1970.47,410.47 2175.47,410.47 2299.53,534.53 ; 2300,535 2299.53,534.53 ; v3@2710,565 2545.04,565 2514.57,534.53 2335,534.53 ; v3@2710,885 2545.04,885 2514.57,854.53 2394.49,854.53 2364.74,824.79 2364.74,564.27 2335,534.53 ; v3(2715,245) 2550.32,245 2540.79,235.47 2377.19,235.47 2335,277.66 2335,534.53 ; 2299.53,534.53 2335,534.53
  Bottom Layer w30: v3(1080,640) 1380,340 P27.2
  other v3: 2710.41,887.28
+3.3VD: C7.2 C9.2 C13.1 C14.1 C19.1 C23.1 C38.1 IC3.13 IC5.14 IC6.14 P20.2 U2.1 U2.3 | length 1232.1
  Top Layer w20: P20.2 660.57,1405 691.36,1435.79 734.06,1435.79 U2.3 ; C38.1 757.4,1505 770.55,1491.85 ; U2.3@730,1435 747.4,1435 770.55,1458.15 770.55,1491.85 ; C23.1@1195,1955 1195,1945.51 1194.33,1944.84 1160.95,1944.84 770.55,1554.44 770.55,1491.85 ; C14.1@1510,1955 1510,1950.51 1504.33,1944.84 1471.56,1944.84 1470,1943.28 1470,1880.87 1537.2,1813.67 IC3.13
+3.3VD_SHIFT: C1.2 C3.2 C40.1 IC1.13 P21.2 U3.1 U3.3 | length 1054.3
  Top Layer w20: P21.2 P21.2@655,395 ; C40.1 757.4,495 770.55,481.85 770.55,448.15 747.4,425 U3.3@735,425 ; U3.3 687.6,427.6 P21.2@655,395 ; IC1.13@1374.53,285 1374.53,291.11 1324.59,341.05 924.82,341.05 870.87,395 P21.2@655,395
+3.3VPSU: P19.1 P20.1 P21.1 P22.1 P27.1 | length 2207.3
  Top Layer w30: P21.1 550,159.47 500,109.47 v2(500,100) 713.25,100 783.25,30 1875,30 1940,95 v2@1950,95 ; v2@1940,105 1950,105 2000,155 P27.1
  Bottom Layer w30: P27.1 P22.1
  other v2: 1945,100
/RST_TIME: IC2.6 IC4.6 TEENSY1.17/A3 | length 1573.9
  Top Layer w10: IC2.6 1398.07,1364.92 1424.92,1364.92 v1(1445,1385) ; IC4.6 1658.07,1364.92 1684.92,1364.92 v1(1705,1385)
  Bottom Layer w15: v1(1445,1385) 1560,1385 ; v1(1705,1385) 1560,1385 ; TEENSY1.17/A3 1715,2329.75 1750,2294.75 1750,1927.26 1560,1737.26 1560,1385
/SCAN_IN: CFD_PACKAGE1.1 IC1.2 | length 375.3
  Top Layer w10: IC1.2 1427.83,494.53 1427.83,520.97 1441.86,535 1505,535 v3(1545,575) 1675,705 CFD_PACKAGE1.1@1675,725
/SCAN_IN_33: IC1.15 TEENSY1.34/A15 | length 3481.3
  Top Layer w10: IC1.15 1423.98,207.84 1450,181.82 v1(1450,145)
  Bottom Layer w10: TEENSY1.34/A15 415,2261.21 360.47,2206.69 360.47,325.89 528.86,157.5 1123.82,157.5 1136.32,145 v1(1450,145)
/SCAN_LOAD: CFD_PACKAGE1.44 IC1.3 | length 422
  Top Layer w10: IC1.3 1402.24,494.53 1402.24,520.97 1460,578.73 v3@1460,580 ; v3(1460,575) 1505,575 1655,725 CFD_PACKAGE1.44@1655,775
/SCAN_LOAD_33: IC1.14 TEENSY1.35/A16 | length 3432.7
  Top Layer w10: IC1.14 1398.39,201.61 v1(1425,175)
  Bottom Layer w10: TEENSY1.35/A16 515,2340 375.47,2200.47 375.47,332.1 535.07,172.5 1422.5,172.5 v1(1425,175)
/SCAN_OUT: CFD_PACKAGE1.41 IC1.8 | length 538.7
  Top Layer w10: IC1.8 1270.43,535.43 1305,570 v3@1310,570 ; v1(1599.41,835.47) 1599.49,835.55 1642.05,835.55 CFD_PACKAGE1.41
  Bottom Layer w10: v3(1310,575) 1441.1,706.1 1470.03,706.1 v1(1599.41,835.47)
/SCAN_OUT_33: IC1.9 TEENSY1.37/A18 | length 3182.8
  Top Layer w10: v1(1230,255) 1266.57,255 1270.43,258.86 IC1.9
  Bottom Layer w10: TEENSY1.37/A18 405.47,2185.47 405.47,344.53 495,255 v1(1230,255)
/SPI_CS_MAIN: IC5.11 TEENSY1.10/CS | length 1075.6
  Top Layer w10: TEENSY1.10/CS 1515,2735 1600,2650 1600,2565.15 1654,2511.15 1654,2468.79 1672.5,2450.29 1672.5,2325.68 1670,2323.18 IC5.11
/SPI_CS_SMALL: IC6.11 TEENSY1.31/A12 | length 1558.3
  Top Layer w10: TEENSY1.31/A12 661,2849 937.37,2849 1270,2516.37 1270,2345 1360,2255 IC6.11@1360,2090
/TIME_MAIN_18: IC3.8 IC4.3 P12.2 | length 490.4
  Top Layer w15: IC3.8 1639.78,1504.55 1639.78,1559.78 v1(1640,1560) ; IC3.8@1640,1500 1640,1483.72 1640.93,1482.8 1643.42,1482.8 1760.1,1366.12 1780.73,1366.12 IC4.3
  Top Layer w20: P12.2@1855,1560 P12.2@1860,1555
  Bottom Layer w15: v1(1640,1560) P12.2
/TIME_MAIN_33: IC3.9 P15.2 | length 254
  Top Layer w20: IC3.9 1639.57,1717.78 1640.71,1716.63 1658.6,1716.63 1695.24,1680 P15.2
/TIME_SMALL_18: IC2.3 IC3.3 P14.2 | length 492.4
  Top Layer w15: P14.2 1485.93,1560 1510,1535.93 1510,1447.83 1492.78,1430.61 1492.78,1373.44 1500.1,1366.12 1520.73,1366.12 IC2.3
/TIME_SMALL_33: IC3.14 P13.2 | length 376.4
  Top Layer w20: P13.2@1180,1675 P13.2 1489.46,1680 1510.47,1701.01 1510.47,1734.53 IC3.14
GND: C1.1 C2.2 C3.1 C4.1 C5.1 C6.2 C7.1 C8.1 C9.1 C10.1 C11.1 C12.1 C13.2 C14.2 C15.2 C16.1 C17.1 C18.1 C19.2 C20.1 C21.1 C22.1 C23.2 C24.2 C25.1 C26.1 C27.1 C28.1 C29.1 C30.1 C31.1 C32.1 C33.1 C35.1 C36.2 C37.2 C38.2 C39.2 C40.2 C41.2 C42.2 C43.2 C44.2 C45.2 C46.2 C47.2 C48.2 C49.2 C50.2 C51.2 C52.2 C53.2 C54.2 C55.2 C56.2 CFD_PACKAGE1.2 CFD_PACKAGE1.7 CFD_PACKAGE1.12 CFD_PACKAGE1.21 CFD_PACKAGE1.24 CFD_PACKAGE1.35 CFD_PACKAGE1.38 CFD_PACKAGE1.40 D3.2 D4.2 D7.2 D8.2 IC1.11 IC1.12 IC2.4 IC3.10 IC3.12 IC3.15 IC4.4 IC5.7 IC6.7 J1.2 J1.3 J1.4 J1.5 pad.3 R6.1 R7.1 TEENSY1.AGND TEENSY1.GND TEENSY1.GND2 U1.2 U2.2 U3.2 U4.2 U5.2 U6.2 U7.2 | length 20
  Top Layer w30: 1525,1395 v1(1525,1415)
  other v1: 1710.04,810.04 1753.35,810.04 1796.65,810.04 1839.96,810.04 1710.04,853.35 1753.35,853.35 1796.65,853.35 1839.96,853.35 1710.04,896.65 1753.35,896.65 1796.65,896.65 1839.96,896.65 1710.04,939.96 1753.35,939.96 1796.65,939.96 1839.96,939.96 2132.39,1062.5 1286.17,1412.37 1585,1440 1255,1910 1470,2085
  other v2: 800,100 1100,100 100,500 3085,1400 3085,1700 3085,2000 3085,2300 100,2600 3085,2600
IIN: C34.2 Q1.3 R5.1 | length 4
  Top Layer w30: R5.1 1810.59,1222.05 R5.1@1811.34,1221.3
IIN_COUPLE: C34.1 CFD_PACKAGE1.28 | length 95.4
  Top Layer w15: CFD_PACKAGE1.28 1775,1039.64 1790.61,1055.26 1790.61,1090.61 C34.1@1795,1095
NetC15_1: C15.1 IC5.13 | length 92.1
  Top Layer w15: C15.1@1600,2170 1600,2168.43 1618.82,2149.61 IC5.13
NetC24_1: C24.1 IC6.13 | length 92.1
  Top Layer w15: C24.1@1290,2170 1290,2168.43 1308.82,2149.61 IC6.13
NetC42_1: C42.1 U1.4 | length 76.1
  Top Layer w20: U1.4 900.83,1137.6 913.43,1125 C42.1@915,1125
NetC43_1: C43.1 U2.4 | length 78.1
  Top Layer w20: U2.4 900.83,1437.6 910,1428.43 C43.1@910,1420
NetC44_1: C44.1 U3.4 | length 73.1
  Top Layer w20: U3.4 900.83,427.6 910,418.43 C44.1@910,415
NetC49_1: C49.1 U4.4 | length 66.9
  Top Layer w20: U4.4 2765.83,957.6 2768.43,955 C49.1@2775,955
NetC50_1: C50.1 U5.4 | length 76.1
  Top Layer w20: U5.4 900.83,827.6 913.43,815 C50.1@915,815
NetC55_1: C55.1 U6.4 | length 73.1
  Top Layer w20: U6.4 2765.83,637.6 2775,628.43 C55.1@2775,625
NetC56_1: C56.1 U7.4 | length 74
  Top Layer w20: U7.4 2765.83,317.6 2773.43,310 C56.1@2780,310
OUT_MAIN: CFD_PACKAGE1.26 IC4.1 | length 349.8
  Top Layer w10: IC4.1@1785,1325 1805,1325 1813.74,1316.26 1813.74,1315.32 1820,1309.06 v1(1820,1305) ; CFD_PACKAGE1.26 1815.43,1008.94 1815.43,1036.37 1825,1045.94 v1(1825,1050)
  Bottom Layer w10: v1(1820,1305) 1820,1300.94 1825,1295.94 v1(1825,1050)
OUT_SMALL: CFD_PACKAGE1.30 IC2.1 | length 449.9
  Top Layer w10: IC2.1@1520,1325 1533.31,1325 1558.31,1300 v1(1560,1300) ; CFD_PACKAGE1.30 1735.63,1069.73 1745,1079.1 v1(1745,1145)
  Bottom Layer w10: v1(1560,1300) 1562.87,1297.13 1562.87,1281.23 1699.1,1145 v1(1745,1145)
RST_TEST: CFD_PACKAGE1.16 IC1.1 | length 800.8
  Top Layer w10: IC1.1 1449.57,491.14 1453.43,495 v3(1550,495) 1832.06,495 1915.67,578.61 1915.67,733.37 1880.16,768.88 1880.16,841.4 1893.76,855 CFD_PACKAGE1.16@1895,855
RST_TEST_33: IC1.16 TEENSY1.33/A14 | length 3535.3
  Top Layer w10: IC1.16 1449.57,220.43 v1(1465,205)
  Bottom Layer w10: TEENSY1.33/A14 315,350.15 522.65,142.5 1117.6,142.5 1137.6,122.5 1459.32,122.5 1472.5,135.68 1472.5,193.44 1465,200.94 v1(1465,205)
SCAN_CLK: CFD_PACKAGE1.43 IC1.7 | length 521.5
  Top Layer w10: IC1.7 1299.88,494.53 1299.88,520.97 1353.91,575 v3@1355,575 ; v3(1360,575) 1408.55,623.55 1525.6,623.55 1595,692.94 1595,762.94 1627.06,795 CFD_PACKAGE1.43@1640,795
SCAN_CLK_33: IC1.10 TEENSY1.36/A17 | length 3257.8
  Top Layer w10: v1(1260,195) 1292.17,227.17 1292.17,255.47 IC1.10
  Bottom Layer w10: TEENSY1.36/A17 615,2416.21 390.47,2191.69 390.47,338.31 533.79,195 v1(1260,195)
SPI_CLK_MAIN: IC5.12 TEENSY1.13/SCK | length 586.8
  Top Layer w10: TEENSY1.13/SCK 1520,2290 1590,2290 1644.41,2235.59 IC5.12
SPI_CLK_SMALL: IC6.12 TEENSY1.32/A13 | length 1639.6
  Top Layer w10: TEENSY1.32/A13 576,2834 931.15,2834 1254,2511.15 1254,2339.79 1334.41,2259.38 IC6.12
SPI_DIN_MAIN: IC5.10 TEENSY1.11/MOSI | length 1125.6
  Top Layer w10: TEENSY1.11/MOSI 1415,2671.37 1569,2517.37 1569,2466 v1(1620,2415) ; v1(1695,2185) 1695.3,2184.7 1695.3,2085.96 IC5.10
  Bottom Layer w10: v1(1620,2415) 1620,2333.18 1695,2258.18 v1(1695,2185)
SPI_DIN_SMALL: IC6.10 TEENSY1.0/RX | length 1767.2
  Top Layer w10: IC6.10 1385.59,2170.59 1475,2260 v1(1520,2260)
  Bottom Layer w10: v1(1520,2260) 1569,2309 1569,2504.15 1805.35,2740.51 2255.51,2740.51 2515,3000 TEENSY1.0/RX
SPI_DOUT_MAIN: IC5.9 TEENSY1.12/MISO | length 1175.7
  Top Layer w10: TEENSY1.12/MISO 1315,2750.15 1554,2511.15 1554,2431 v1(1650,2335) ; IC5.9 1723.09,2087.58 1723.09,2218.09 v1(1725,2220)
  Bottom Layer w10: v1(1650,2335) 1725,2260 v1@1725,2225
SPI_DOUT_SMALL: IC6.9 TEENSY1.1/TX | length 1671.7
  Top Layer w10: IC6.9 1411.18,2151.18 v1(1480,2220)
  Bottom Layer w10: v1(1480,2220) 1480,2260 1554,2334 1554,2510.37 1799.14,2755.51 2220,2755.51 2415,2950.51 TEENSY1.1/TX
SPI_INTRPT_MAIN: IC5.8 TEENSY1.9/CS | length 1055.8
  Top Layer w10: TEENSY1.9/CS 1615,2571.37 1676,2510.37 1676,2468 1746,2398 1746,2306.2 1747.5,2304.7 1747.5,2099.09 IC5.8@1743.93,2095.51
SPI_INTRPT_SMALL: IC6.8 TEENSY1.27 | length 1269.6
  Top Layer w10: IC6.8 1438.39,2087.28 1438.39,2138.39 v1(1440,2140)
  Bottom Layer w10: TEENSY1.27 1354,2556 1354,2226 v1(1440,2140)
TDC_CLK: IC5.5 IC6.5 TEENSY1.14/A0 | length 951.2
  Top Layer w15: v1(1385,1910) 1385.3,1909.7 1385.3,1854.63 IC6.5 ; IC5.5 1695.89,1854.63 1695.89,1908.51 v1(1696.19,1908.81)
  Bottom Layer w15: v1(1385,1910) 1695,1910 v1(1696.19,1908.81)
  Bottom Layer w30: TEENSY1.14/A0 1415,2235 1545,2105 1545,2020
TDC_EN_MAIN: IC5.1 TEENSY1.8 | length 1333.5
  Top Layer w10: IC5.1 1597.09,1858.19 1597.09,1884.63 1681.02,1968.56 1681.7,1968.56 1765.63,2052.49 1765.63,2307.79 1761,2312.42 1761,3049 TEENSY1.8
TDC_EN_SMALL: IC6.1 TEENSY1.28 | length 1546.3
  Top Layer w15: v1(1145,1890) 1180,1855 1281.87,1855 1282.54,1854.33 IC6.1
  Bottom Layer w15: TEENSY1.28 715,2736.31 814.81,2636.5 832.19,2636.5 973.5,2495.19 973.5,2061.5 v1(1145,1890)
TDC_START_MAIN: IC5.3 TEENSY1.6 | length 1356.1
  Top Layer w10: IC5.3 1648.27,1858.19 1648.27,1892.7 1850,2094.44 1850,2474.85 1854,2478.85 1854,2511.15 1850,2515.15 1850,3030 TEENSY1.6
TDC_START_SMALL: IC6.3 TEENSY1.30 | length 1821.4
  Top Layer w15: IC6.3 1334.7,1854.04 1334.7,1785.3 v1(1335,1785)
  Bottom Layer w15: TEENSY1.30 515,2753.69 773.5,2495.19 773.5,2186.14 1137.62,1822.03 1219.71,1822.03 1266.73,1775 1322.29,1775 1332.29,1785 v1(1335,1785)
TDC_TRIGG_MAIN: IC5.2 TEENSY1.7 | length 1329.6
  Top Layer w10: IC5.2@1620,1850 1622.68,1852.68 1622.68,1888.33 1780.63,2046.28 1780.63,2314 1776,2318.63 1776,2586.35 1815,2625.35 TEENSY1.7
TDC_TRIGG_SMALL: IC6.2 TEENSY1.29 | length 1699.8
  Top Layer w15: v1(1290,1800) 1290,1802.71 1307.46,1820.17 1307.46,1852.97 IC6.2
  Bottom Layer w15: TEENSY1.29 615,2736.31 797.81,2553.5 815.19,2553.5 873.5,2495.19 873.5,2126.14 1134.64,1865 1225,1865 v1(1290,1800)
TIME_MAIN_18: IC3.6 IC4.5 P12.1 | length 393.8
  Top Layer w15: IC3.6 1589.74,1502.97 1589.74,1472.99 1617.74,1445 v1(1640,1445) 1640,1442.29 1657.99,1424.3 IC4.5@1657.99,1386.12
  Top Layer w20: P12.1@1854.7,1460.3 P12.1@1860,1455
  Bottom Layer w15: v1(1640,1445) 1845,1445 P12.1
TIME_MAIN_33: IC3.11 IC5.4 P15.1 | length 328.4
  Top Layer w20: IC3.11 1589.53,1736.81 1589.53,1770.33 1613.9,1794.7 1643.89,1794.7 1845.3,1794.7 P15.1 ; P15.1@1855.3,1794.7 P15.1@1860,1790
TIME_SMALL_18: IC2.5 IC3.1 P14.1 | length 376
  Top Layer w15: P14.1 1460,1460 ; IC2.5 1405.63,1384.53 1407.22,1386.12 1407.22,1393.76 1460.43,1446.97 1460.43,1499.57 IC3.1@1460,1500
TIME_SMALL_33: IC3.16 IC6.4 P13.1 | length 392.5
  Top Layer w20: P13.1 1210.3,1754.7 1425.72,1754.7 IC3.16@1459.29,1754.7 ; IC6.4@1361.14,1835.3 1361.14,1818.86 1425.72,1754.28
VBG_TEST: C25.2 CFD_PACKAGE1.15 P6.2 | length 986.3
  Top Layer w10: CFD_PACKAGE1.15 1937.21,835.63 1946.58,845 v1(1950,845) ; v1(2260,965) 2304.23,1009.23 2304.23,1039.23 2375.47,1110.47 2375.47,1141.37 2554.1,1320 P6.2
  Top Layer w20: C25.2 P6.2@2554.1,1320
  Bottom Layer w10: v1(1950,845) 1970.47,865.47 1970.47,876.37 1993.63,899.53 2194.53,899.53 v1(2260,965) ; P6.2@2554.1,1320 P6.2
VBG_TEST_I: P6.1 TEENSY1.23/A9 | length 1435.6
  Top Layer w20: TEENSY1.23/A9 2799.53,2010.47 2799.53,1464.53 P6.1
VDAC_MAIN: C26.2 CFD_PACKAGE1.22 P4.2 | length 1092.7
  Top Layer w10: CFD_PACKAGE1.22 1923.43,973.43 1955,1005 2067.94,1005 2100.19,1037.24 2213.46,1037.24 2345,1168.79 2345,1350 P4.2
  Top Layer w20: C26.2 P4.2
VDAC_MAIN_IO: P4.1 TEENSY1.21/A7 | length 1302.9
  Top Layer w20: TEENSY1.21/A7 2338.27,2271.73 2454.24,2271.73 2749.53,1976.45 2749.53,1654.53 2660,1565 P4.1@2655,1565
VDAC_SMALL: C27.2 CFD_PACKAGE1.34 P8.2 | length 1891.2
  Top Layer w10: C27.2 1328.54,681.97 1397.93,751.35 1397.93,824.98 1507.94,935 1565.9,935 1605.9,975 CFD_PACKAGE1.34@1640,975
  Bottom Layer w10: P8.2 825.12,1514.88 825.12,1279.52 1324.64,780 v1(1400,780)
VDAC_SMALL_IO: P8.1 TEENSY1.39/A20 | length 943.2
  Top Layer w20: P8.1 445,1854.53 432.63,1866.89 412.84,1866.89 400.47,1879.26 400.47,1980.47 TEENSY1.39/A20
VDDAON: C20.2 C21.2 C22.2 CFD_PACKAGE1.3 CFD_PACKAGE1.9 CFD_PACKAGE1.42 P1.2 P29.2 P31.1 R1.2 | length 2923.9
  Top Layer w15: C22.2 1533.54,686.97 1577.5,730.93 1577.5,770.19 1620.01,812.7 CFD_PACKAGE1.42@1631.91,812.7 ; C21.2@1715,655 1715.47,655.47 1715.47,741.65 CFD_PACKAGE1.3 ; CFD_PACKAGE1.9 1834.53,741.65 1834.53,705.47 v1(1835,705) 1859.75,680.25 1861.32,680.25 C20.2@1885,656.57
  Top Layer w20: R1.2 P1.2
  Bottom Layer w30: v1@1565,725 1585.28,704.72 1726.63,704.72 1761.35,670 1800,670 v1(1835,705) ; 1782.89,670 1942.42,510.47 2036.87,510.47 2062.34,485 P29.2 ; P31.1 P29.2 ; P1.2 2465.47,1590.47 2465.47,539.93 2415,489.45 P29.2
  other v1: 1716,704.72 1567.23,722.04
VDDAON_I: P1.1 R1.1 TEENSY1.20/A6 | length 1520.3
  Top Layer w20: TEENSY1.20/A6 2263.27,2246.73 2443.89,2246.73 2724.53,1966.1 2724.53,1749.53 P1.1 2644.22,1690.78 2607.19,1690.78 2573.44,1724.53 2459.46,1724.53 2439.84,1704.91 2439.84,1700.42 2428.13,1688.7 2425.16,1688.7 2419.41,1682.95 R1.1
VDDHV: C16.2 C17.2 C18.2 CFD_PACKAGE1.5 CFD_PACKAGE1.14 CFD_PACKAGE1.39 P22.2 | length 1080.3
  Top Layer w10: CFD_PACKAGE1.14 1942.48,815.94 1985,773.43 C18.2@1985,770
  Top Layer w15: CFD_PACKAGE1.5 1758.56,738.88 1758.56,721.54 1768.19,711.91 1770.38,711.91 1777.29,705 v1(1780,705) 1780,702.29 1786.83,695.46 1786.83,669.74 1791.57,665 C17.2@1795,665
  Top Layer w20: C16.2@1536.57,770 1570.77,804.19 1570.77,845.73 1599.29,874.25 CFD_PACKAGE1.39@1634.41,874.25
  Bottom Layer w20: v1(1592.88,867.81) 1593.84,866.85 1606.92,866.85 1767.82,705.96 1779.04,705.96 v1(1780,705)
  Bottom Layer w30: v1(1780,705) 1787.04,712.04 1787.04,739.79 1804.61,757.36 1887.36,757.36 ; v1@1940,810 1887.36,757.36 ; P22.2 1887.36,672.64 1887.36,757.36
  other v1: 1945.14,812.98
VDDMAIN: C11.2 C12.2 CFD_PACKAGE1.20 CFD_PACKAGE1.25 P7.2 P23.2 P25.1 R3.2 | length 2048.4
  Top Layer w10: CFD_PACKAGE1.25 1835.12,1008.94 1835.12,1028.3 1847.5,1040.68 1847.5,1062.5 v1(1875,1090) ; CFD_PACKAGE1.20 1967.48,934.06 1978.43,945 C11.2@1980,945
  Top Layer w15: C11.2 1986.46,953.03 2017.66,921.83 2067.42,921.83 2085.85,940.26 2115.26,940.26 C12.2@2125,950
  Top Layer w20: R3.2 P7.2
  Bottom Layer w30: v1(1875,1090) 1875,1010 v1@1960,925 ; v1(1961.4,922.34) 1981.08,922.34 2063.74,1005 2415,1005 ; P23.2@2410,1125 2415,1130 2415,1660 P7.2 ; P25.1 2415,1005 ; P23.2 2415,1005
VDDMAIN_I: P7.1 R3.1 TEENSY1.19/A5/SCL | length 1458.9
  Top Layer w20: TEENSY1.19/A5/SCL 2188.27,2221.73 2433.53,2221.73 2699.53,1955.74 2699.53,1844.53 P7.1 2644.22,1810.78 2607.19,1810.78 2573.44,1844.53 2459.46,1844.53 2439.84,1824.91 2439.84,1820.42 2428.13,1808.7 2425.16,1808.7 2419.41,1802.95 R3.1
VDDRF: pad.4@1705,1195 R5.2 | length 68.8
  Top Layer w30: pad.4@1705,1195 1712.86,1195 1739.16,1221.3 1758.66,1221.3 1760,1222.64 R5.2@1760,1225
VDDSMALL: C5.2 CFD_PACKAGE1.36 P9.2 P24.2 P26.1 R4.2 | length 1741
  Top Layer w20: P9.2 R4.2 ; C5.2 1533.54,851.97 C5.2@1536.57,855 ; C5.2@1535,855 C5.2@1536.57,855 ; CFD_PACKAGE1.36 1641.38,933.31 1614.88,933.31 C5.2@1536.57,855
  Bottom Layer w20: P26.1 1395,715 v1@1580,900
  Bottom Layer w30: P9.2 785,1435 785,1235 P24.2
  other v1: 1579.62,897.65
VDDSMALL_IO: P9.1 R4.1 TEENSY1.38/A19 | length 1314.7
  Top Layer w20: R4.1@680,1675 674.84,1680.16 674.84,1685.23 640.54,1719.53 526.56,1719.53 501.56,1694.53 464.53,1694.53 P9.1 445,1730 430.37,1744.63 415.1,1744.63 375.47,1784.26 375.47,2055.47 TEENSY1.38/A19
VDDTEST: C6.1 CFD_PACKAGE1.13 P28.2 P30.1 | length 815.3
  Top Layer w10: CFD_PACKAGE1.13@1910,795 1922.94,795 1950.09,767.85 1950.09,723.33 1986.46,686.97 C6.1
  Bottom Layer w30: v1(1950.14,727.98) 2412.02,727.98 2415,725 ; P30.1 2415,725 ; P28.2 2415,725
VE_DEGEN: C35.2 Q1.2 R7.2 | length 137.3
  Top Layer w30: C35.2@1915,1360 1915,1356.57 1925.59,1345.98 R7.2 ; R7.2@1925,1285 1926.34,1283.66 1926.34,1237.64 Q1.2
VIN: J1.1 Q1.1 R6.2 | length 284
  Top Layer w30: R6.2 1917.95,1115.59 1918.7,1116.34 1918.7,1164.72 Q1.1 1957.66,1179.41 2028.25,1250 J1.1
VIN_TEST: CFD_PACKAGE1.17 D5.2 D7.1 pad.4@2010,855 | length 109.3
  Top Layer w15: CFD_PACKAGE1.17 1983.08,875 1998.08,860 pad.4@2010,855
VINN_ZCD_SMALL: CFD_PACKAGE1.32 D2.2 D4.1 P18.1 | length 163.6
  Top Layer w15: P18.1 1650,1075 1695,1030
VINP_LED_SMALL: CFD_PACKAGE1.31 D1.2 D3.1 pad.4@1705,1095 | length 177.4
  Top Layer w15: D3.1@1655,1160 1655,1145 1705,1095 1705,1083.08 1715.94,1072.13 CFD_PACKAGE1.31
VINP_ZCD_SMALL: CFD_PACKAGE1.33 D6.2 D8.1 P18.2 | length 140.2
  Top Layer w15: P18.2 1557.83,975 1590.7,1007.87 CFD_PACKAGE1.33
VOUT_TEST: CFD_PACKAGE1.18 P3.2 | length 989.6
  Top Layer w10: CFD_PACKAGE1.18 1988.78,894.69 1998.43,904.33 2074.67,904.33 2081.99,911.65 2138.7,911.65 2360,1132.94 2360,1332.06 2467.94,1440 P3.2
VOUT_TEST_I: P3.1 TEENSY1.22/A8 | length 1366.3
  Top Layer w20: TEENSY1.22/A8 2413.27,2296.73 2464.6,2296.73 2774.53,1986.81 2774.53,1559.53 P3.1
VREF_ATTEN: C29.2 CFD_PACKAGE1.27 P2.2 R2.2 | length 1522.2
  Top Layer w10: CFD_PACKAGE1.27 1794.69,996.22 1800.43,990.47 1800.43,988.32 1808.6,980.16 1879.2,980.16 1939.04,1040 C29.2 ; C29.2@1986.46,1041.97 2029.49,1085 2240,1085 2330,1175 2330,1776.46 2470,1916.46 R2.2@2470,1920
  Top Layer w20: R2.2 P2.2
VREF_ATTEN_O: P2.1 R2.1 TEENSY1.A22/DAC1 | length 2043.4
  Top Layer w20: R2.1@2428.13,1928.7 2439.84,1940.42 2439.84,1944.91 2459.46,1964.53 2573.44,1964.53 2607.19,1930.78 2644.22,1930.78 P2.1
  Top Layer w30: v3(1265,2580) v3(1420,2580) ; v3(1645,2675) 1719.23,2600.77 1724.23,2600.77 v3(1725,2600) ; v3(2300,1920) R2.1@2415,1920
  Bottom Layer w30: TEENSY1.A22/DAC1 1200,2580 v3(1265,2580) ; v3(1420,2580) 1515,2675 v3(1645,2675) ; v3(1725,2600) 1726.08,2600 1769.27,2556.81 1822.49,2556.81 1866,2513.3 1866,2354 v3(2300,1920)
VREF_PREAMP: C28.2 CFD_PACKAGE1.29 P5.2 | length 2066.3
  Top Layer w10: C28.2 1330,766.46 v1(1330,815) ; CFD_PACKAGE1.29 1755.32,1051.26 1760,1055.94 v1(1760,1060)
  Bottom Layer w10: P5.2@560,1915 560,1900 840.12,1619.88 840.12,1285.74 1125.86,1000 1145,1000 v1(1330,815) 1529.53,1014.53 1680.43,1014.53 1725.9,1060 v1(1760,1060)
VREF_PREAMP_IO: P5.1 TEENSY1.21/DAC0 | length 814
  Top Layer w20: P5.1@445,1920 450,1920 1015,2485 TEENSY1.21/DAC0
pads on no net: CFD_PACKAGE1.4 CFD_PACKAGE1.6 CFD_PACKAGE1.8 CFD_PACKAGE1.10 CFD_PACKAGE1.11 CFD_PACKAGE1.19 CFD_PACKAGE1.23 CFD_PACKAGE1.37 IC1.6 IC3.2 IC3.7 IC5.6 IC6.6 TEENSY1.2 TEENSY1.3/CANTX TEENSY1.3V3 TEENSY1.3V3_2 TEENSY1.3V3_LO TEENSY1.4/CANRX TEENSY1.5 TEENSY1.15/A1 TEENSY1.16/A2 TEENSY1.18/A4/SDA TEENSY1.24 TEENSY1.25 TEENSY1.26 TEENSY1.A10 TEENSY1.A11 TEENSY1.AREF TEENSY1.GND3 TEENSY1.PROG TEENSY1.RESET TEENSY1.U5V TEENSY1.UD+ TEENSY1.UD- TEENSY1.UGND1 TEENSY1.UGND2 TEENSY1.VBAT TEENSY1.VIN TEENSY1.VUSB
copper on no net:
  other v2: 100,800 100,1100 100,1400 100,1700 100,2000 100,2300

## Polygon pours and split planes (outlines as drawn)
GND on Top Layer "NONET_L-01_P-001" (solid, remove dead copper, pour order 0): 0,0 0,3310 3185,3310 3185,0
GND on Bottom Layer "NONET_L-01_P-001" (solid, remove dead copper, pour order 1): 0,3310 3185,3310 3185,0 0,0

## Other copper
Top Layer:
  region net TIME_SMALL_33: 1355,1820 1355,1760 1415,1760
  region net TIME_MAIN_33: 1640,1795 1665,1820 1665,1830 1675,1830 1675,1820 1700,1795
  region net +3.3VD_SHIFT: 655,390 690,425 750,425 750,390
  region net +3.3VCHIP: 2580,320 2580,250 2705,250 2635,320
  region net +3.3VCHIP: 2580,640 2580,570 2695,570 2625,640
  region net +3.3VCHIP: 2580,965 2580,895 2695,895 2625,965
  region net +3.3VCHIP: 2375,565 2395,545 2355,545
  region net +1.8VA: 1140,1025 1140,950 1210,950 1220,950
  region net GND: 2810,280 2810,1050 2855,1050 2855,280
  region net +1.8VD_SHIFT: 1340,520 1380,520 1380,450 1535,450 1535,375 1340,375
  region net +1.8VD: 1545,1350 1545,1475 1560,1475 1560,1350
  region net +1.8VD: 1530,1475 1530,1545 1495,1580 1605,1580 1570,1545 1570,1475
  region net +3.3VD: 1380,1660 1500,1660 1530,1690 1530,1710 1545,1710 1545,1690 1575,1660 1720,1660 1720,1620 1380,1620
  region net +1.8VD: 1610,1350 1610,1320 1675,1320 1675,1325 1675,1340 1800,1340 1800,1350 1735,1350 1675,1350
  region net +1.8VD: 1350,1350 1350,1320 1415,1320 1415,1325 1415,1340 1570,1340 1570,1350 1415,1350
  region net +1.8VA: 1165,1175 1235,1175 1235,1185 1275,1185 1275,1135 1165,1135
  region net +1.8VA: 1165,990 1235,990 1235,1000 1275,1000 1275,950 1165,950
  region net +1.8VA: 1425,1265 1495,1265 1495,1275 1535,1275 1535,1225 1425,1225
  region net +1.8VA: 2222.5,830 2327.5,830 2327.5,770 2222.5,770
  region net +3.3VD: 1175,2010 1600,2010 1600,1935 1175,1935
  region net +3.3VPSU: 515,360 515,1440 585,1440 585,360
  region net VINP_LED_SMALL: 1625,1150 1625,1275 1665,1275 1665,1150
  region net VINP_ZCD_SMALL: 1365,875 1365,1005 1550,1005 1550,945 1405,945 1405,875
  region net VINN_ZCD_SMALL: 1365,1185 1365,1045 1550,1045 1550,1105 1405,1105 1405,1110 1405,1185
  region net VIN_TEST: 2010,885 2075,885 2090,900 2090,805 2070,825 2010,825
  region net VIN_TEST: 2090,900 2130,900 2130,775 2090,775
  region net +3.3VD_SHIFT: 1345,50 1345,185 1365,185 1365,235 1380,235 1380,185 1390,185 1390,50
  region net +3.3VD: 1485,1935 1485,2055 1580,2055 1580,2120 1600.12,2121.19 1600.12,1936.19
  region net +3.3VD: 1175,1935 1175,2055 1270,2055 1270,2120 1290,2120 1290,1935
  region net IIN: 1790,1200 1770,1180 1770,1130 1820,1130 1875,1185 1875,1220 1845,1250 1790,1250
Bottom Layer:
  region net GND: 1700,950 1700,800 1850,800 1850,950
  region net +3.3VCHIP: 2670,220 2670,1065 2750,1065 2750,220
  region net +1.8VPSU: 2575,270 2575,975 2660,975 2660,270
  region net VDDSMALL: 1000,715 1000,1010 1050,1010 1050,715
  region net +1.8VA: 905,1285 1100,1285 1130,1255 1130,1010 1150,1010 1307.5,1167.5 1400,1260 1400,1280 1145,1280 1100,1325 905,1325
  region net TDC_CLK: 1385,1910 1705,1910 1545,2035

## Silkscreen, mask and mechanical layers (free items; w line width, h text height)
Top Overlay:
  text "USB -->" at 1880.06,2760.01 h60
  text "GND" at 35,2639.99 h30 r270
  text "GND" at 3150,2560.01 h30 r90
  text "GND" at 35,2339.99 h30 r270
  text "MEASUREMENT / JUMPERS" at 195,2335 h60 r270
  text "GND" at 3150,2260.01 h30 r90
  text "GND" at 35,2039.99 h30 r270
  text "GND" at 3150,1960.01 h30 r90
  text "GND" at 35,1739.99 h30 r270
  text "GND" at 3150,1660.01 h30 r90
  text "VD" at 405.01,1504.98 h60 r270
  text "GND" at 35,1439.99 h30 r270
  text "GND" at 3150,1360.01 h30 r90
  text "VA" at 405.01,1194.98 h60 r270
  text "GND" at 35,1139.99 h30 r270
  text "LDO" at 2580,1120 h20
  text "MEASUREMENT / JUMPERS" at 2892.98,1050.18 h60 r90
  text "SMALL" at 405.01,1009.95 h60 r270